# Altium PCB LT6018_breakout.PcbDoc
Units mm, origin at the board's own origin, x right, y up, seen from the top; angles counter-clockwise.
Board outline 10.16 x 20.78 mm, 2 copper layers (Top Layer, Bottom Layer); 7 components, 7 nets, 25 pads, 14 vias.
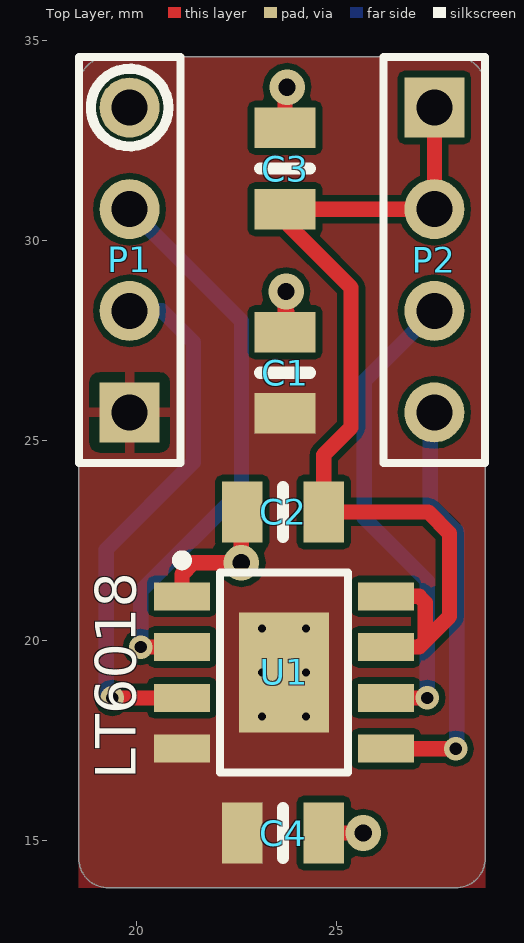
[diagram p0: Top Layer view]
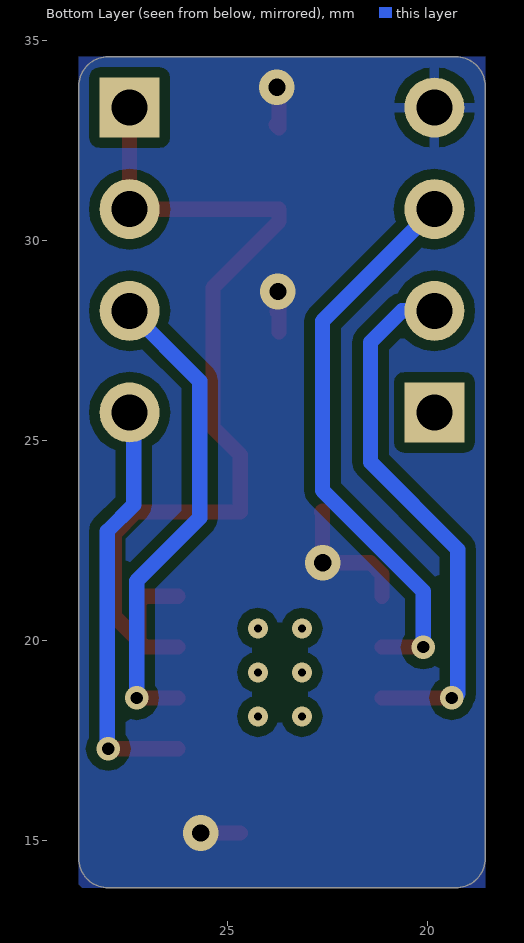
[diagram p1: Bottom Layer view, seen from below]
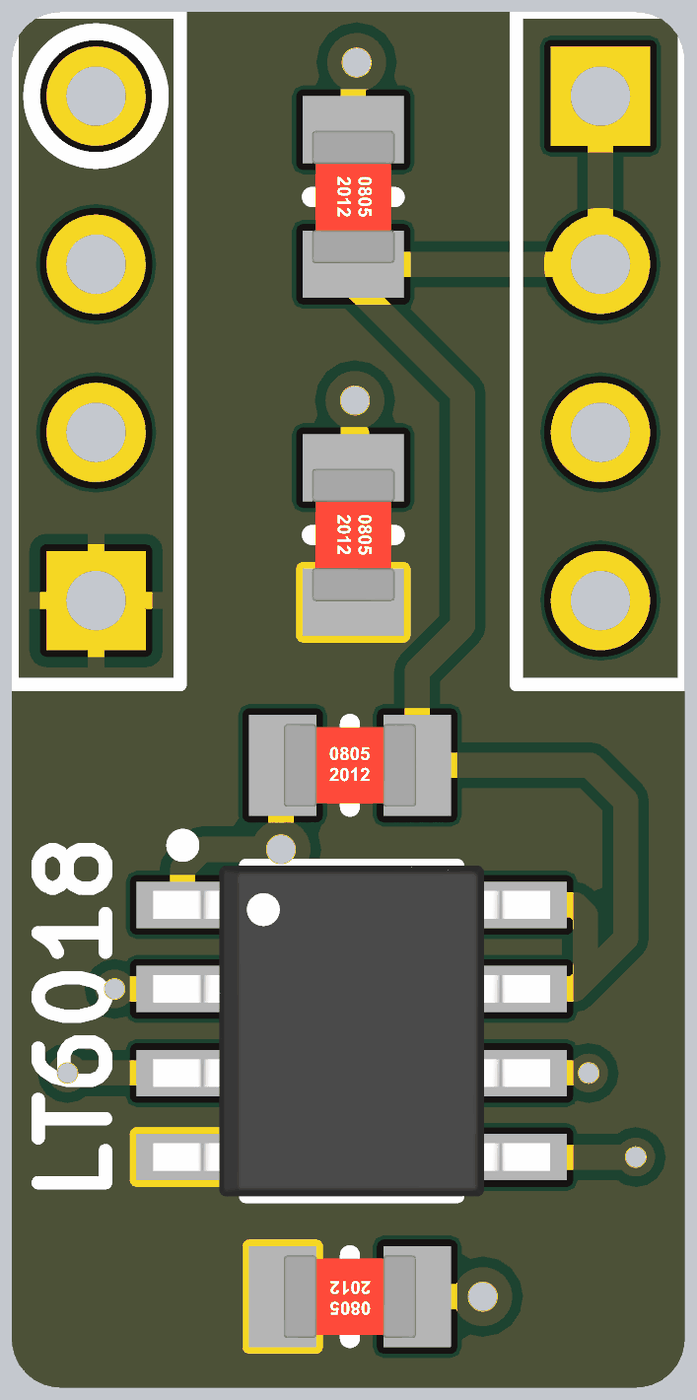
[diagram p2: 3D render of the assembled board from above, using the file's embedded part models]

## Layer stack, top to bottom
Top Solder: solder mask 0.0102, Solder Resist, Dk 3.5
Top Layer: signal copper 0.0356
Dielectric 1: dielectric 0.32, FR-4, Dk 4.8
Bottom Layer: signal copper 0.0356
Bottom Solder: solder mask 0.0102, Solder Resist, Dk 3.5

## Board outline
18.567,14.554 18.567,33.858 cw(c19.304,33.858) 19.304,34.595 27.99,34.595 cw(c27.99,33.858) 28.727,33.858 28.727,14.554 cw(c27.991,14.554) 27.991,13.818 19.304,13.818 cw(c19.304,14.554)

## Design rules (kind name [scope] priority, off if disabled: settings)
Clearance Clearance_2 [InNamedPolygon('v-')] p1: gap=0.152 ignorepadtopadclearanceinfootprint=FALSE
Clearance Clearance_1 [InNamedPolygon('v-')] p2: gap=0.178 ignorepadtopadclearanceinfootprint=FALSE
Clearance [All] p3: gap=0.254 ignorepadtopadclearanceinfootprint=FALSE except(0: Arc-Hole Track-Hole SMDPad-Hole THPad-Hole Via-Hole Fill-Hole Poly-Hole Region-Hole Text-Hole)
PolygonConnect PolygonConnect_2 [All vs IsNamedPolygon('v-')] p1: thpad.connectstyle=Relief thpad.reliefconductorwidth=0.254 thpad.reliefentries=4 thpad.polygonreliefangle="90 Angle" thpad.airgapwidth=0.254 smdpad.connectstyle=Direct smdpad.reliefconductorwidth=0.254 smdpad.reliefentries=4 smdpad.polygonreliefangle="90 Angle" smdpad.airgapwidth=0.254 via.connectstyle=Direct via.reliefconductorwidth=0.254 via.reliefentries=4 via.polygonreliefangle="90 Angle" via.airgapwidth=0.254
PolygonConnect PolygonConnect_1 [All vs IsNamedPolygon('gnd')] p2: thpad.connectstyle=Relief thpad.reliefconductorwidth=0.254 thpad.reliefentries=4 thpad.polygonreliefangle="90 Angle" thpad.airgapwidth=0.254 smdpad.connectstyle=Direct smdpad.reliefconductorwidth=0.254 smdpad.reliefentries=4 smdpad.polygonreliefangle="90 Angle" smdpad.airgapwidth=0.254 via.connectstyle=Direct via.reliefconductorwidth=0.254 via.reliefentries=4 via.polygonreliefangle="90 Angle" via.airgapwidth=0.254
PolygonConnect [All] p3: connectstyle=Relief reliefconductorwidth=0.254 reliefentries=4 polygonreliefangle="90 Angle" airgapwidth=0.254
RoutingVias [All] p1: holewidth=0.711 width=1.27 viastyle="Through Hole" minholewidth=0.711 minwidth=1.27 maxholewidth=0.711 maxwidth=1.27
SolderMaskExpansion [All] p1: expansion=0.102
Width [All] p1: maxlimit=1.27 minlimit=0.254 preferedwidth=0.381
30 further rules are at their usual default settings.

## Classes and differential pairs
net class input: NetP1_2 NetP1_3

## Components (designator, comment, footprint, x,y, rotation, side; value= is the part's Value field where it differs from the comment)
C1 "10uF" SMD-0805C 23.724,26.695 r180 top
C2 "0.1uF" SMD-0805C 23.673,23.216 r270 top
C3 "10uF" SMD-0805C 23.724,31.801 r180 top
C4 "0.1uF" SMD-0805C 23.673,15.189 r90 top
P1 "Header 4" HDR1X4 19.837,25.705 r90 top
P2 "Header 4" HDR1X4 27.457,33.325 r270 top
U1 "LT6018" LT6018 23.698,19.202 r0 top

## Footprints (in the part's own frame and the unit in brackets; to place one, negate y for a bottom-side part, rotate by r counter-clockwise, add the part's x,y. Pads: shape width x height; smd on the part's side, far side on the other; paste and mask are expansions set on the pad)
HDR1X4 [mm] "Connector; Header; 4 Position"
  rect 1.5x1.5 hole 0.9: 1(0,0)
  round 1.5 hole 0.9: 2(2.54,0) 3(5.08,0) 4(7.62,0)
  silkscreen extent -1.27,-1.27 8.89,1.27
LT6018 [mm] "SOIC, 8-Leads, Body 4.90x3.90mm, Pitch 1.27mm, Thermal Pad 2.99x2.26mm, IPC Low Density"
  rect 1.4x0.7 smd: 1(-2.55,1.905) 2(-2.55,0.635) 3(-2.55,-0.635) 4(-2.55,-1.905) 5(2.55,-1.905) 6(2.55,-0.635) 7(2.55,0.635) 8(2.55,1.905)
  rect 2.26x2.99 smd: 9(0,0)
  silkscreen extent -2.67,-2.5 1.6,2.93, body extent -3,-2.5 3,2.5, height 1.75
SMD-0805C [mil]
  rect 60x40 smd: 1(0,40) 2(0,-40)
  silkscreen extent -25,0 25,0, body extent -25,-39 25,39, height 35

## Part data
C1 C2 C3 C4: library part GC321AD72E103KX01D, "CAP CER 10000PF 250V X7T 0805", Digi-Key Part Number=490-13986-1-ND, Manufacturer="Murata Electronics North America", Operating Temperature="-55°C ~ 125°C", Package / Case="0805 (2012 Metric)", Ratings=AEC-Q200, Temperature Coefficient=X7T, Tolerance=±10%, Voltage=250V, @ qty=0, Applications=Automotive, Datasheets=http://search.murata.co.jp/Ceramy/image/img/A01X/G101/ENG/GC321AD72E103KX01-01.pdf, Factory Stock=0, Features=-, Height - Seated (Max)=-, Image=//media.digikey.com/Renders/Murata%20Renders/0805(GC3)200x125.jpg, Lead Spacing=-, Lead Style=-, Minimum Quantity=1, Mounting Type="Surface Mount, MLCC", Packaging="Cut Tape (CT)", Part Number=GC321AD72E103KX01D, Part Status=Active, Quantity Available=4000, Series=GC3, Size / Dimension="0.079\" L x 0.049\" W (2.00mm x 1.25mm)", Thickness (Max)="0.039\" (1.00mm)", Unit Price (USD)=0.3
P1 P2: "Header, 4-Pin", LatestRevisionDate=17-Jul-2002, LatestRevisionNote="Re-released for DXP Platform.", Publisher="Altium Limited"

## Via types
v1: diameter 0.5, hole 0.2, Top Layer to Bottom Layer, 6 vias
v2: diameter 0.889, hole 0.432, Top Layer to Bottom Layer, tented both sides, 4 vias
v3: diameter 0.584, hole 0.305, Top Layer to Bottom Layer, tented both sides, 4 vias

## Nets (pads, with @x,y where several pads share a name; then routed paths per layer and width w, separated by ;. In a path a pad name is that pad's centre, name@x,y a point inside that pad or via, vN(x,y) a via of type N, cw(c..) or ccw(c..) an arc to the next point about the centre after c; other vN are vias at no path point)
GND: C1.2 C2.2 C3.2 C4.2 P1.4 U1.1 | length 6.7
  Top Layer w0.381: U1.1 21.148,21.656 21.438,21.946 v2(22.631,21.946) 22.631,23.241 C2.2 ; C1.2 C1.2@23.724,28.169 ; v2(23.749,28.727) 23.724,28.702 C1.2@23.724,28.169 ; 23.774,28.219 C1.2@23.724,28.169 ; v2(23.774,33.833) 23.724,33.782 C3.2 C3.2@23.8,32.893 ; C4.2 v2(25.679,15.189)
NetC1_1: C1.1 C4.1 P1.1 U1.4 U1.9
  other v1: 23.148,18.102 24.248,18.102 23.148,19.202 24.248,19.202 23.148,20.302 24.248,20.302
NetC2_1: C2.1 C3.1 P2.1 P2.2 U1.7 U1.8 | length 24.2
  Top Layer w0.381: U1.7 27.076,19.837 27.229,19.99 ; U1.8 27.076,21.107 27.229,20.955 27.229,19.99 ; P2.1 P2.2 C3.1 23.724,30.48 25.375,28.829 25.375,25.324 24.689,24.638 C2.1 27.305,23.216 27.838,22.682 27.838,20.599 27.229,19.99
NetP1_2: P1.2 U1.3 | length 13.6
  Top Layer w0.381: v3(19.406,18.567) U1.3
  Bottom Layer w0.381: v3(19.406,18.567) 19.355,18.567 19.253,18.669 19.253,22.276 21.438,24.46 21.438,27.457 20.65,28.245 P1.2
NetP1_3: P1.3 U1.2 | length 14.2
  Top Layer w0.381: v3(20.117,19.837) U1.2
  Bottom Layer w0.381: P1.3 22.632,27.99 22.632,23.75 20.117,21.234 v3(20.117,19.837)
NetP2_3: P2.3 U1.6 | length 12.1
  Top Layer w0.381: U1.6 v3(27.28,18.567)
  Bottom Layer w0.381: v3(27.28,18.567) 27.28,21.488 25.705,23.063 25.705,26.493 P2.3
NetP2_4: P2.4 U1.5 | length 10.5
  Top Layer w0.381: U1.5 v3(27.991,17.297)
  Bottom Layer w0.381: P2.4 27.356,25.604 27.356,23.393 28.016,22.733 28.016,17.323 v3(27.991,17.297)

## Polygon pours and split planes (outlines as drawn)
GND on Bottom Layer "gnd" (solid, pour order 0): 18.567,34.595 28.727,34.595 28.727,13.818 18.567,13.818
NetC1_1 on Top Layer "v-" (solid, pour order 2): 18.567,13.818 28.727,13.818 28.727,34.595 18.567,34.595

## Silkscreen, mask and mechanical layers (free items; w line width, h text height)
Top Overlay:
  circle w0.254: c19.837,33.325 r0.972
  text "LT6018" at 19.99,16.535 h1.02 r90